# Altium PCB Tp_Integrador.PcbDoc
Units mm, origin at the board's own origin, x right, y up, seen from the top; angles counter-clockwise.
Board outline 80 x 80 mm, 2 copper layers (Top Layer, Bottom Layer); 32 components, 34 nets, 122 pads, 2 vias.
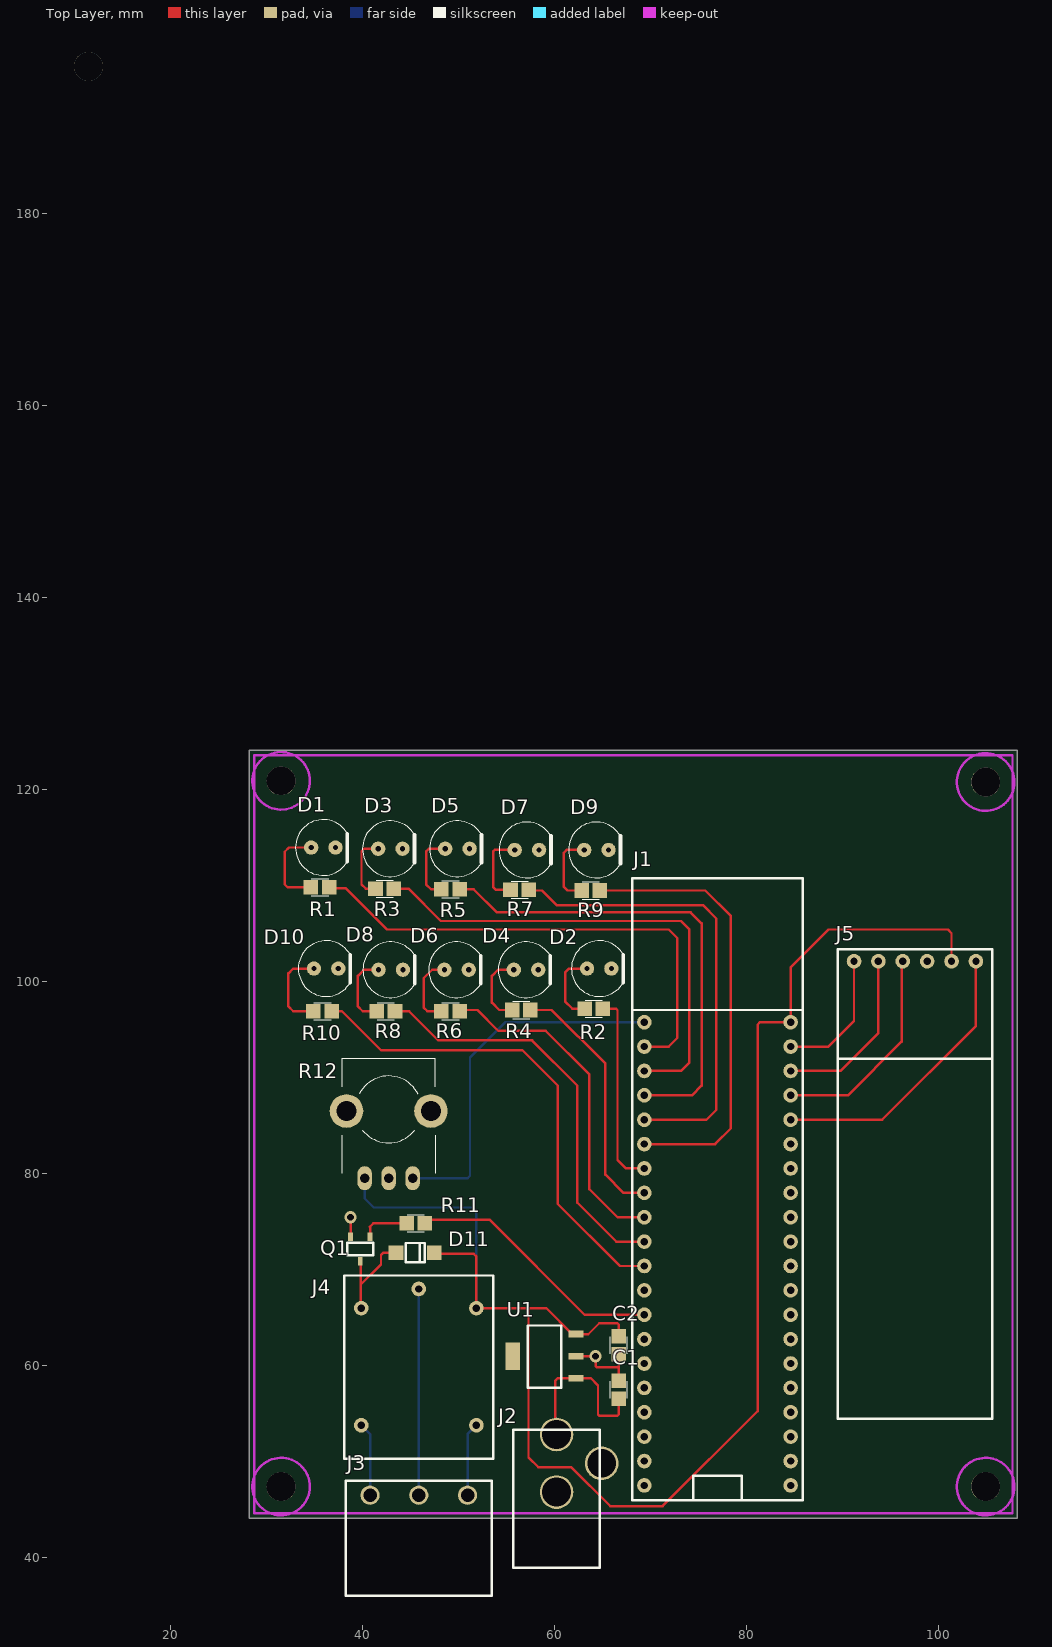
[diagram p0: Top Layer view]
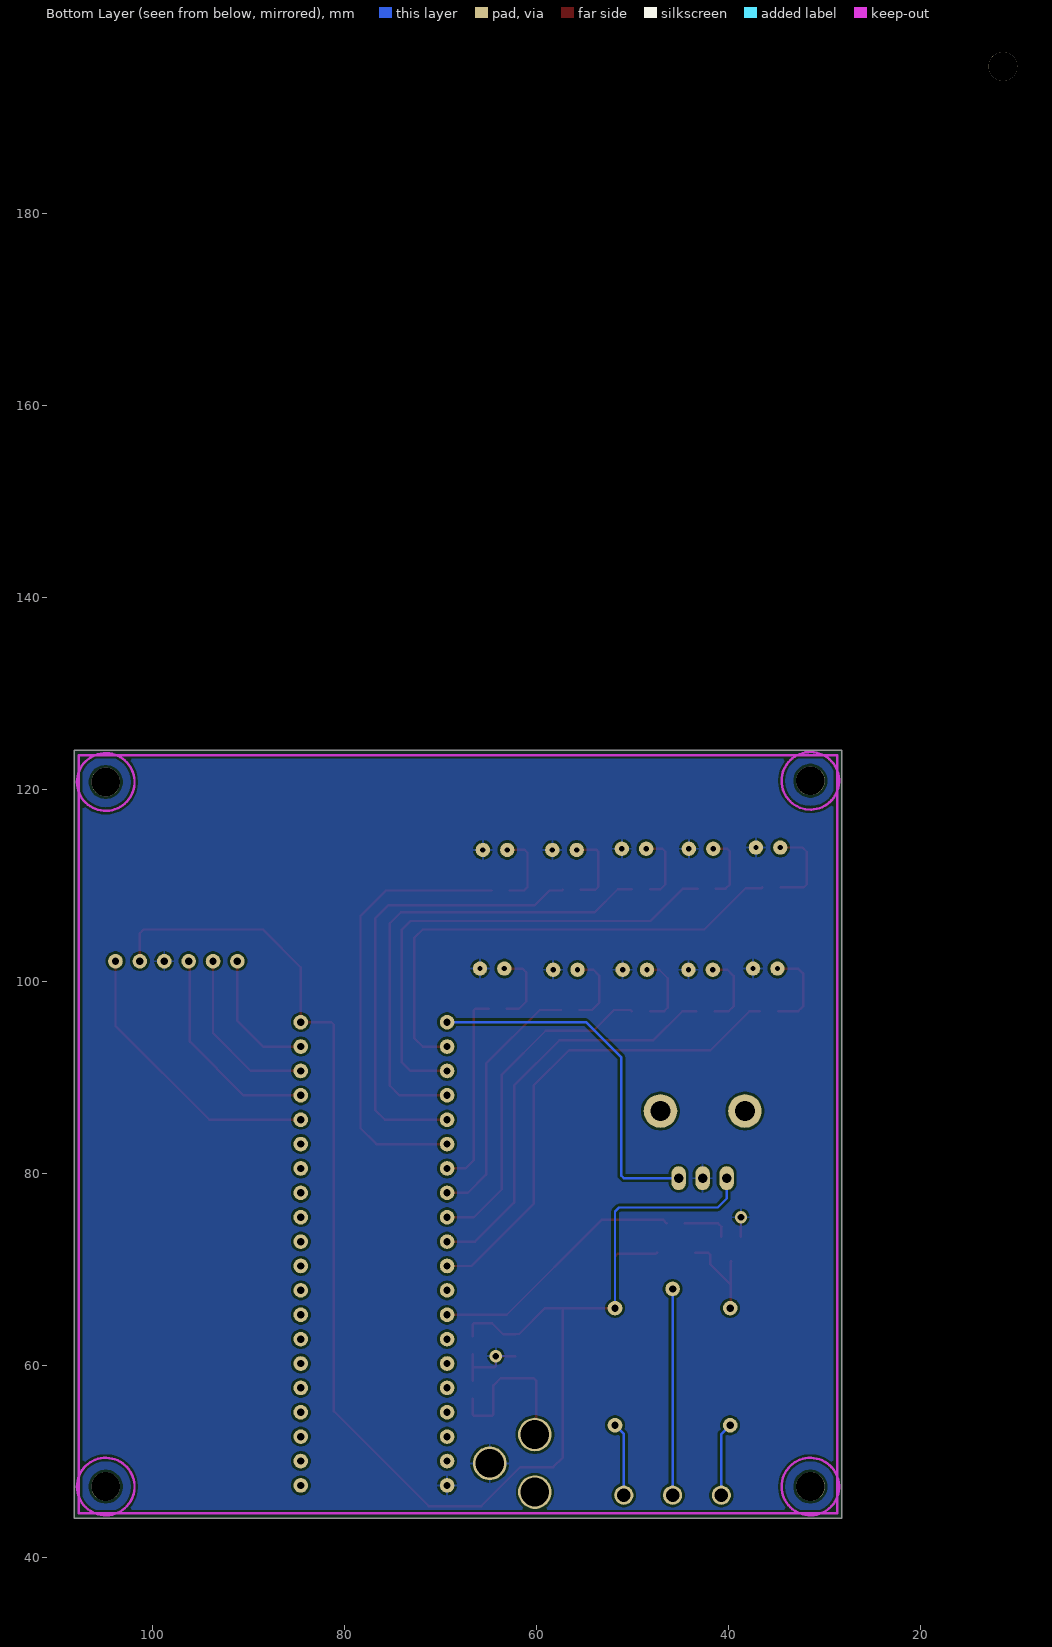
[diagram p1: Bottom Layer view, seen from below]
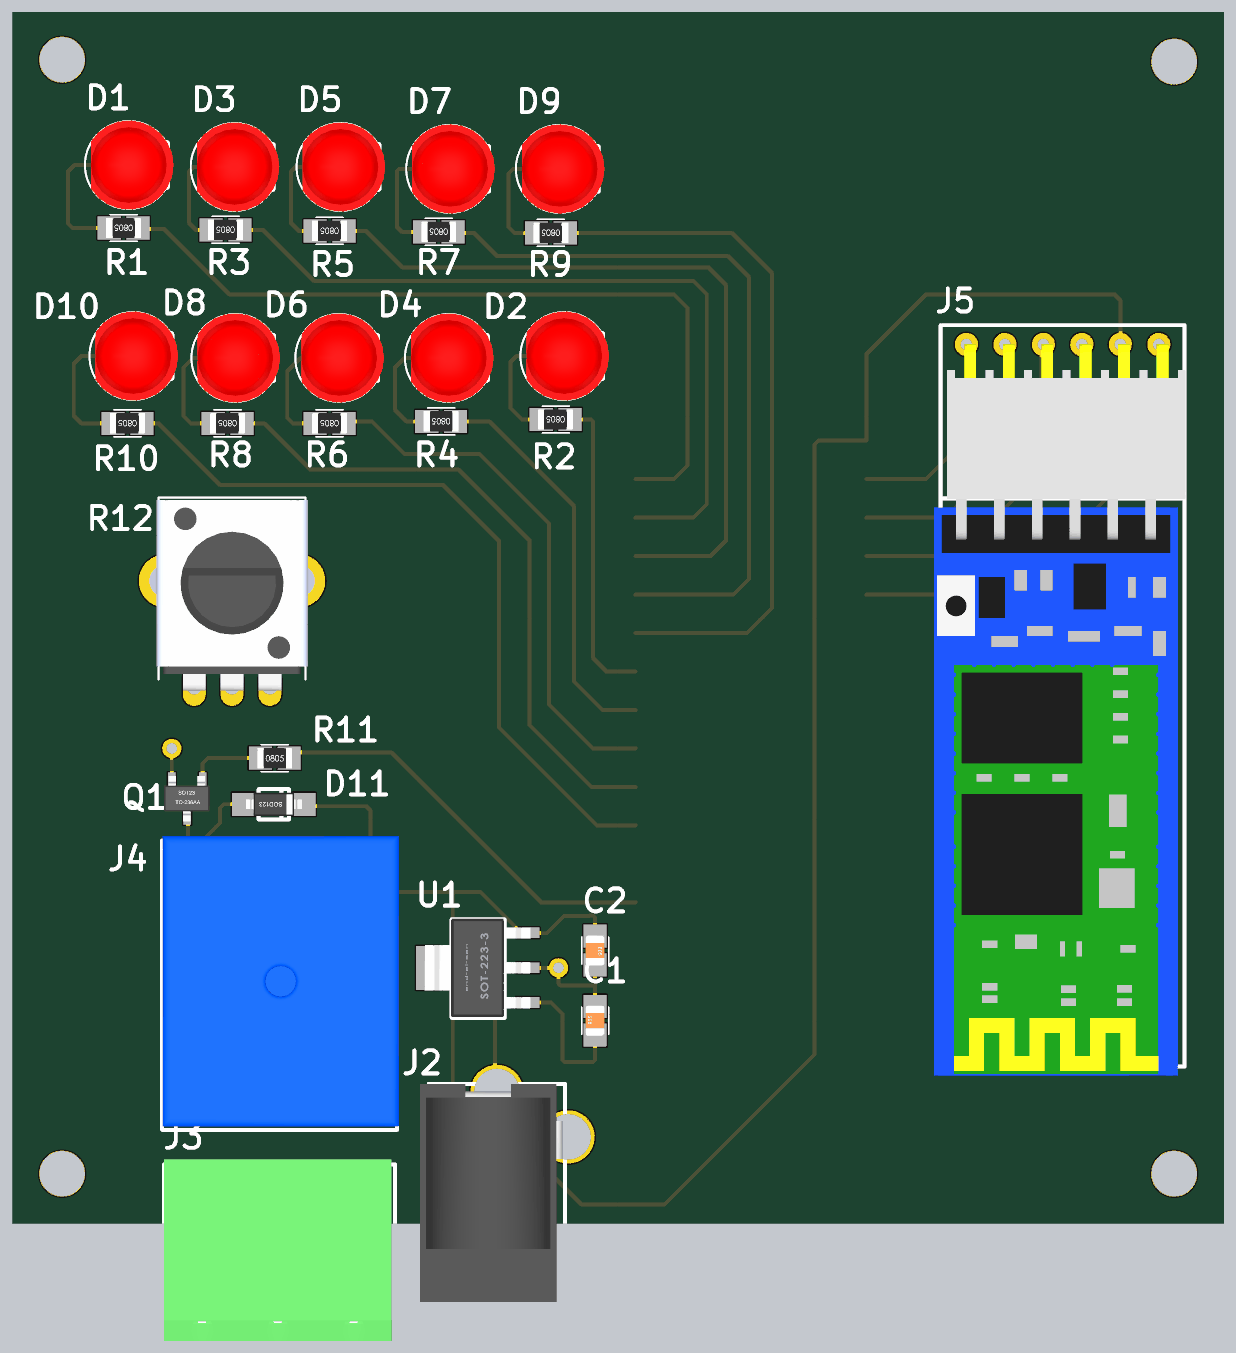
[diagram p2: 3D render of the assembled board from above, using the file's embedded part models]

## Layer stack, top to bottom
Top Solder: solder mask 0.0102, Solder Resist, Dk 3.5
Top Layer: signal copper 0.0356
Dielectric 1: dielectric 0.32, FR-4, Dk 4.8
Bottom Layer: signal copper 0.0356
Bottom Solder: solder mask 0.0102, Solder Resist, Dk 3.5

## Board outline
28.204,44.069 28.204,124.069 108.204,124.069 108.204,44.069

## Design rules (kind name [scope] priority, off if disabled: settings)
Clearance Clearance_1 [All] p1: gap=0.254 ignorepadtopadclearanceinfootprint=FALSE
Clearance [All] p2: gap=0.254 ignorepadtopadclearanceinfootprint=FALSE
Height [All] p1: minheight=0 maxheight=50 prefheight=12.7
HoleSize [All] p1: absolutevalues=TRUE maxlimit=10 minlimit=0.025 maxpercent=80.000 minpercent=20.000
PolygonConnect [All] p1: connectstyle=Relief reliefconductorwidth=0.254 reliefentries=4 polygonreliefangle="90 Angle" airgapwidth=0.254
RoutingVias [All] p1: holewidth=0.711 width=1.27 viastyle="Through Hole" minholewidth=0.711 minwidth=1.27 maxholewidth=0.711 maxwidth=1.27
SolderMaskExpansion [All] p1: expansion=0.102 istentingtop=FALSE
SupplyNets "Schematic Supply Nets_3" [InNet('VCC')] p1: voltage=0.000
SupplyNets "Schematic Supply Nets_2" [InNet('3v3')] p2: voltage=0.000
SupplyNets "Schematic Supply Nets_1" [InNet('GND')] p3: voltage=0.000
Width Width_1 [All] p1: maxlimit=1.016 minlimit=0.254 preferedwidth=0.254 minimp=50.000000 maximp=50.000000 favimp=50.000000
Width [All] p2: maxlimit=0.254 minlimit=0.254 preferedwidth=0.254
28 further rules are at their usual default settings.

## Classes and differential pairs
component class LPC845BRK: J1

## Components (designator, comment, footprint, x,y, rotation, side; value= is the part's Value field where it differs from the comment)
C1 "1uf 25v" C_0805 66.675,57.47 r90 top
C2 "1uf 25v" C_0805 66.675,62.103 r270 top
D1 "LED" "LED 5MM" 35.898,113.953 r0 top
D2 "LED" "LED 5MM" 64.643,101.346 r0 top
D3 "LED" "LED 5MM" 42.881,113.826 r0 top
D4 "LED" "LED 5MM" 57.023,101.219 r0 top
D5 "LED" "LED 5MM" 49.868,113.826 r0 top
D6 "LED" "LED 5MM" 49.784,101.219 r0 top
D7 "LED" "LED 5MM" 57.105,113.699 r0 top
D8 "LED" "LED 5MM" 42.926,101.219 r0 top
D9 "LED" "LED 5MM" 64.344,113.699 r0 top
D10 "LED" "LED 5MM" 36.195,101.346 r0 top
D11 "D" DIODE 45.466,71.755 r0 top
J1 "LPC845_BRK" LPC845_BRK 264.922,65.278 r0 top
J2 "PJ-002A" JACK 60.198,46.101 r90 top
J3 "Conn_01x03" BORNIER 45.847,46.482 r0 top
J4 "Rele" RELE 45.847,59.817 r270 top
J5 "Bluetooth" HC-05 97.536,102.108 r0 top
Q1 "BC817" TRANSISTOR 39.751,72.136 r180 top
R1 "330" R_0805 35.555,109.797 r0 top
R2 "330" R_0805 64.069,97.155 r0 top
R3 "330" R_0805 42.282,109.67 r0 top
R4 "330" R_0805 56.515,97.028 r0 top
R5 "330" R_0805 49.149,109.601 r0 top
R6 "330" R_0805 49.149,96.901 r0 top
R7 "330" R_0805 56.355,109.543 r0 top
R8 "330" R_0805 42.418,96.901 r0 top
R9 "330" R_0805 63.754,109.474 r0 top
R10 "330" R_0805 35.814,96.901 r0 top
R11 "1k5" R_0805 45.527,74.803 r180 top
R12 "R_potenciometro" POTE_9.5MM_PTV09-HORIZONTAL 42.712,86.502 r0 top
U1 "MPC16301" REGULADOR 58.928,60.96 r90 top (schematic designator U*)

## Footprints (in the part's own frame and the unit in brackets; to place one, negate y for a bottom-side part, rotate by r counter-clockwise, add the part's x,y. Pads: shape width x height; smd on the part's side, far side on the other; paste and mask are expansions set on the pad)
BORNIER [mm]
  round 2 hole 1.4: 1(-5.08,0) 2(0,0) 3(5.08,0)
  silkscreen extent -7.62,-10.5 7.62,1.5, body extent -7.62,-10.16 7.38,1.84, height 8.57
C_0805 [mil]
  rect 60x60 smd: 1(-37.4,0) 2(37.4,0)
  silkscreen extent -35,-35 35,35, body extent -39,-25 39,25, height 31
DIODE [mil]
  rect 60x60 smd: 1(-78.74,0) 2(78.74,0)
  silkscreen extent -39,-39 39,39, body extent -73,-31 73,31, height 53
HC-05 [mil]
  round 60 hole 30: 1(-250,0) 2(-150,0) 3(-50,0) 4(50,0) 5(150,0) 6(250,0)
  silkscreen extent -317,-1876 317,50, body extent -334,-1900 320,2, height 244
JACK [mm]
  round 3.5 hole 3: 1(6.7,0) 2(3.7,-4.7) 3(0.7,0)
  silkscreen extent -7.2,-4.5 7.2,4.5, body extent -7.2,-4.32 7.2,5.08, height 11.5
"LED 5MM" [mm]
  round 1.5 hole 0.55: 1(-1.27,0) 2(1.27,0)
  silkscreen extent -2.9,-2.9 2.51,2.9, body extent -2.5,-2.95 2.94,2.95, height 21.85
LPC845_BRK [mil]
  round 60 hole 30: 1(-7700,1200) 2(-7700,1100) 3(-7700,1000) 4(-7700,900) 5(-7700,800) 6(-7700,700) 7(-7700,600) 8(-7700,500) 9(-7700,400) 10(-7700,300) 11(-7700,200) 12(-7700,100) 13(-7700,0) 14(-7700,-100) 15(-7700,-200) 16(-7700,-300) 17(-7700,-400) 18(-7700,-500) 19(-7700,-600) 20(-7700,-700) 21(-7100,-700) 22(-7100,-600) 23(-7100,-500) 24(-7100,-400) 25(-7100,-300) 26(-7100,-200) 27(-7100,-100) 28(-7100,0) 29(-7100,100) 30(-7100,200) 31(-7100,300) 32(-7100,400) 33(-7100,500) 34(-7100,600) 35(-7100,700) 36(-7100,800) 37(-7100,900) 38(-7100,1000) 39(-7100,1100) 40(-7100,1200)
  silkscreen extent -7750,-760 -7050,1790, body extent -7751,-760 -7050,1810, height 658
POTE_9.5MM_PTV09-HORIZONTAL [mm]
  oval 1.5x2.5 hole 1: 1(-2.5,-7) 2(2.5,-7) 3(0,-7)
  round 3.5 hole 2.1: ""(-4.4,0) ""(4.4,0)
  silkscreen extent -4.85,-6.5 4.85,5.5, body extent -5.65,-7.25 5.65,5.35, height 31.64
R_0805 [mil]
  rect 60x60 smd: 1(-37.4,0) 2(37.4,0)
  silkscreen extent -35,-35 35,35, body extent -45,-27 45,27, height 30
REGULADOR [mil]
  rect 27.56x60 smd: 1(-90,-130) 2(0,-130) 3(91.1,-130)
  rect 114.17x60 smd: 4(0,130)
  silkscreen extent -130,-70 126,68, body extent -128,-138 128,138, height 67
RELE [mil]
  round 60 hole 30: 1(238.19,-236.22) 2(-320.87,0) 3(238.19,236.22) 4(-242.13,236.22) 5(-242.13,-236.22)
  silkscreen extent -376,-305 376,305, body extent -388,-304 368,310, height 622
TRANSISTOR [mm]
  rect 0.5x0.9 smd: 1(1.016,-1.27) 2(-1.016,-1.27) 3(0,1.27)
  silkscreen extent -1.35,-0.65 1.35,0.65, body extent -1.48,-1.5 1.52,1.5, height 1.3

## Part data
C1 C2: library part "Capacitor Non Polarized_1", "Capacitor NP"
D1 D2 D3 D4 D5 D6 D7 D8 D9 D10: "Led"
D11: "DIODO"
J1: "LPC845 breakoutBoard"
J3: "Header 3x1"
J5: "Header 6x1"
Q1: library part "Transistor NPN", "Transistor NPN"
R1 R2 R3 R4 R5 R6 R7 R8 R9 R10 R11: library part Resistor, "Resistor"
U1: "Regulador Lineal"

## Free pads (board coordinates)
  round 3 hole 3: 4(11.43,195.326) 4(31.496,47.371) 4(31.496,120.904) 4(104.902,47.371) 4(104.902,120.777)

## Via types
v1: diameter 1.27, hole 0.711, Top Layer to Bottom Layer, 2 vias

## Nets (pads, with @x,y where several pads share a name; then routed paths per layer and width w, separated by ;. In a path a pad name is that pad's centre, name@x,y a point inside that pad or via, vN(x,y) a via of type N, cw(c..) or ccw(c..) an arc to the next point about the centre after c; other vN are vias at no path point)
1LED: J1.2 R1.2 | length 52.7
  Top Layer w0.254: R1.2 36.574,109.728 38.227,109.728 42.545,105.41 71.882,105.41 72.771,104.521 72.771,94.107 71.882,93.218 J1.2
2LED: J1.3 R3.2 | length 51.5
  Top Layer w0.254: R3.2 44.762,109.67 48.133,106.299 73.152,106.299 74.041,105.41 74.041,91.567 73.152,90.678 J1.3
3LED: J1.4 R5.2 | length 50
  Top Layer w0.254: R5.2 51.562,109.601 53.975,107.188 74.168,107.188 75.311,106.045 75.311,89.154 74.295,88.138 J1.4
3v3: C2.1 D11.2 J1.40 J4.4 J5.5 R12.1 U1.3 | length 168.7
  Top Layer w0.254: D11.2 47.593,71.628 51.562,71.628 51.847,71.343 J4.4 57.404,65.967 ; C2.1 66.675,64.262 66.526,64.411 66.316,64.411 66.294,64.389 64.643,64.389 63.5,63.246 62.258,63.246 U1.3 61.818,63.274 59.125,65.967 57.404,65.967 ; J5.5 101.346,105.029 100.965,105.41 88.519,105.41 84.582,101.473 J1.40 81.407,95.758 81.153,95.504 81.153,55.245 71.247,45.339 65.786,45.339 61.722,49.403 58.293,49.403 57.277,50.419 57.277,65.84 57.404,65.967
  Bottom Layer w0.254: R12.1 40.212,77.39 41.148,76.454 51.435,76.454 51.847,76.042 J4.4
4LED: J1.5 R7.2 | length 48.6
  Top Layer w0.254: R7.2 57.374,109.474 58.674,109.474 60.198,107.95 75.438,107.95 76.835,106.553 76.835,86.614 75.819,85.598 J1.5
5LED: J1.6 R9.2 | length 46.6
  Top Layer w0.254: R9.2 75.692,109.474 78.359,106.807 78.359,84.709 76.708,83.058 J1.6
6LED: J1.7 R2.2 | length 20.4
  Top Layer w0.254: R2.2 66.399,97.155 66.548,97.006 66.548,81.407 67.437,80.518 J1.7
7LED: J1.8 R4.2 | length 26.5
  Top Layer w0.254: R4.2 59.69,97.028 65.278,91.44 65.278,79.883 67.183,77.978 J1.8
8LED: J1.9 R6.2 | length 35.2
  Top Layer w0.254: R6.2 50.226,97.028 51.943,97.028 54.102,94.869 59.055,94.869 63.627,90.297 63.627,78.359 66.548,75.438 J1.9
9LED: J1.10 R8.2 | length 43.1
  Top Layer w0.254: R8.2 44.831,96.901 47.879,93.853 57.658,93.853 62.357,89.154 62.357,76.962 66.421,72.898 J1.10
10LED: J1.11 R10.2 | length 50.8
  Top Layer w0.254: R10.2 37.846,96.901 41.91,92.837 56.642,92.837 60.325,89.154 60.325,76.835 66.802,70.358 J1.11
GND: C1.2 C2.2 D1.2 D2.2 D3.2 D4.2 D5.2 D6.2 D7.2 D8.2 D9.2 D10.2 J1.20 J2.2 J5.4 Q1.1 R12.3 U1.2 | length 10.3
  Top Layer w0.254: Q1.1 v1(38.735,75.438) ; U1.2 v1(64.262,60.96) 64.262,59.935 64.411,59.786 66.675,59.786 ; J2.2@64.897,49.8 J2.2 ; C1.2 66.675,59.786 ; C2.2 66.675,59.786
Key: J1.36 J5.6 | length 30.1
  Top Layer w0.254: J1.36 94.107,85.598 103.886,95.377 J5.6
NetD1_1: D1.1 R1.1 | length 9.2
  Top Layer w0.254: R1.1 32.189,109.797 31.877,110.109 31.877,113.516 32.314,113.953 D1.1
NetD2_1: D2.1 R2.1 | length 7.8
  Top Layer w0.254: R2.1 61.849,97.155 61.087,97.917 61.087,100.943 61.49,101.346 D2.1
NetD3_1: D3.1 R3.1 | length 6.9
  Top Layer w0.254: R3.1 40.317,109.67 39.878,110.109 39.878,113.538 40.166,113.826 D3.1
NetD4_1: D4.1 R4.1 | length 7.8
  Top Layer w0.254: R4.1 54.229,97.028 53.467,97.79 53.467,100.584 54.102,101.219 D4.1
NetD5_1: D5.1 R5.1 | length 7.3
  Top Layer w0.254: R5.1 47.117,109.601 46.609,110.109 46.609,113.538 46.897,113.826 D5.1
NetD6_1: D6.1 R6.1 | length 7.6
  Top Layer w0.254: R6.1 46.736,96.901 46.355,97.282 46.355,100.33 47.244,101.219 D6.1
NetD7_1: D7.1 R7.1 | length 7.9
  Top Layer w0.254: R7.1 53.906,109.543 53.594,109.855 53.594,113.538 53.755,113.699 D7.1
NetD8_1: D8.1 R8.1 | length 7.8
  Top Layer w0.254: R8.1 40.005,96.901 39.497,97.409 39.497,100.584 40.132,101.219 D8.1
NetD9_1: D9.1 R9.1 | length 7.8
  Top Layer w0.254: R9.1 61.341,109.474 60.96,109.855 60.96,113.411 61.248,113.699 D9.1
NetD10_1: D10.1 R10.1 | length 9.1
  Top Layer w0.254: R10.1 32.766,96.901 32.258,97.409 32.258,100.838 32.766,101.346 D10.1
NetD11_1: D11.1 J4.5 Q1.3 | length 10.6
  Top Layer w0.254: Q1.3 39.799,70.818 39.799,68.417 ; J4.5 39.799,66.015 39.799,68.417 ; D11.1 42.164,71.755 41.91,71.501 41.91,70.527 39.799,68.417
NetJ3_1: J3.1 J4.1 | length 7.7
  Bottom Layer w0.254: J4.1 40.767,52.847 J3.1
NetJ3_2: J3.2 J4.2 | length 21.5
  Bottom Layer w0.254: J3.2 J4.2
NetJ3_3: J3.3 J4.3 | length 7.7
  Bottom Layer w0.254: J3.3 50.927,52.847 J4.3
NetQ1_2: Q1.2 R11.2 | length 5
  Top Layer w0.254: Q1.2 40.767,74.422 40.745,74.444 41.104,74.803 R11.2
Pote: J1.1 R12.2 | length 38.1
  Bottom Layer w0.254: R12.2 50.927,79.502 51.181,79.756 51.181,92.075 54.864,95.758 J1.1
Rele: J1.13 R11.1 | length 27.1
  Top Layer w0.254: R11.1 46.858,75.184 53.213,75.184 63.119,65.278 J1.13
RxD: J1.38 J5.2 | length 18.3
  Top Layer w0.254: J1.38 89.789,90.678 93.726,94.615 J5.2
State: J1.39 J5.1 | length 13.9
  Top Layer w0.254: J1.39 88.519,93.218 91.186,95.885 J5.1
TxD: J1.37 J5.3 | length 22.3
  Top Layer w0.254: J1.37 90.551,88.138 96.139,93.726 96.139,101.981 J5.3
VCC: C1.1 J2.1 U1.1 | length 17.5
  Top Layer w0.254: J2.1 60.071,52.928 60.071,58.42 60.325,58.674 U1.1 63.754,58.674 64.516,57.912 64.516,54.886 64.665,54.737 66.526,54.737 66.675,54.886 C1.1
pads on no net: J1.12 J1.14 J1.15 J1.16 J1.17 J1.18 J1.19 J1.21 J1.22 J1.23 J1.24 J1.25 J1.26 J1.27 J1.28 J1.29 J1.30 J1.31 J1.32 J1.33 J1.34 J1.35 J2.3 R12. U1.4

## Polygon pours and split planes (outlines as drawn)
GND on Bottom Layer "GND_L02_P000" (solid, pour order 0): 28.702,123.571 107.442,123.571 107.442,44.577 28.702,44.577

## Keep-outs
Keep-Out Layer:
  circle w0.254: c31.496,47.371 r3
  circle w0.254: c31.496,120.904 r3
  circle w0.254: c104.902,120.777 r3
  circle w0.254: c104.902,47.371 r3
  lines w0.254: 28.702,44.577 28.702,123.571 107.696,123.571 107.696,44.577 28.702,44.577

## Silkscreen, mask and mechanical layers (free items; w line width, h text height)
Mechanical 1:
  the board outline again, w0.254